# Allegro board AVRUSB500.brd
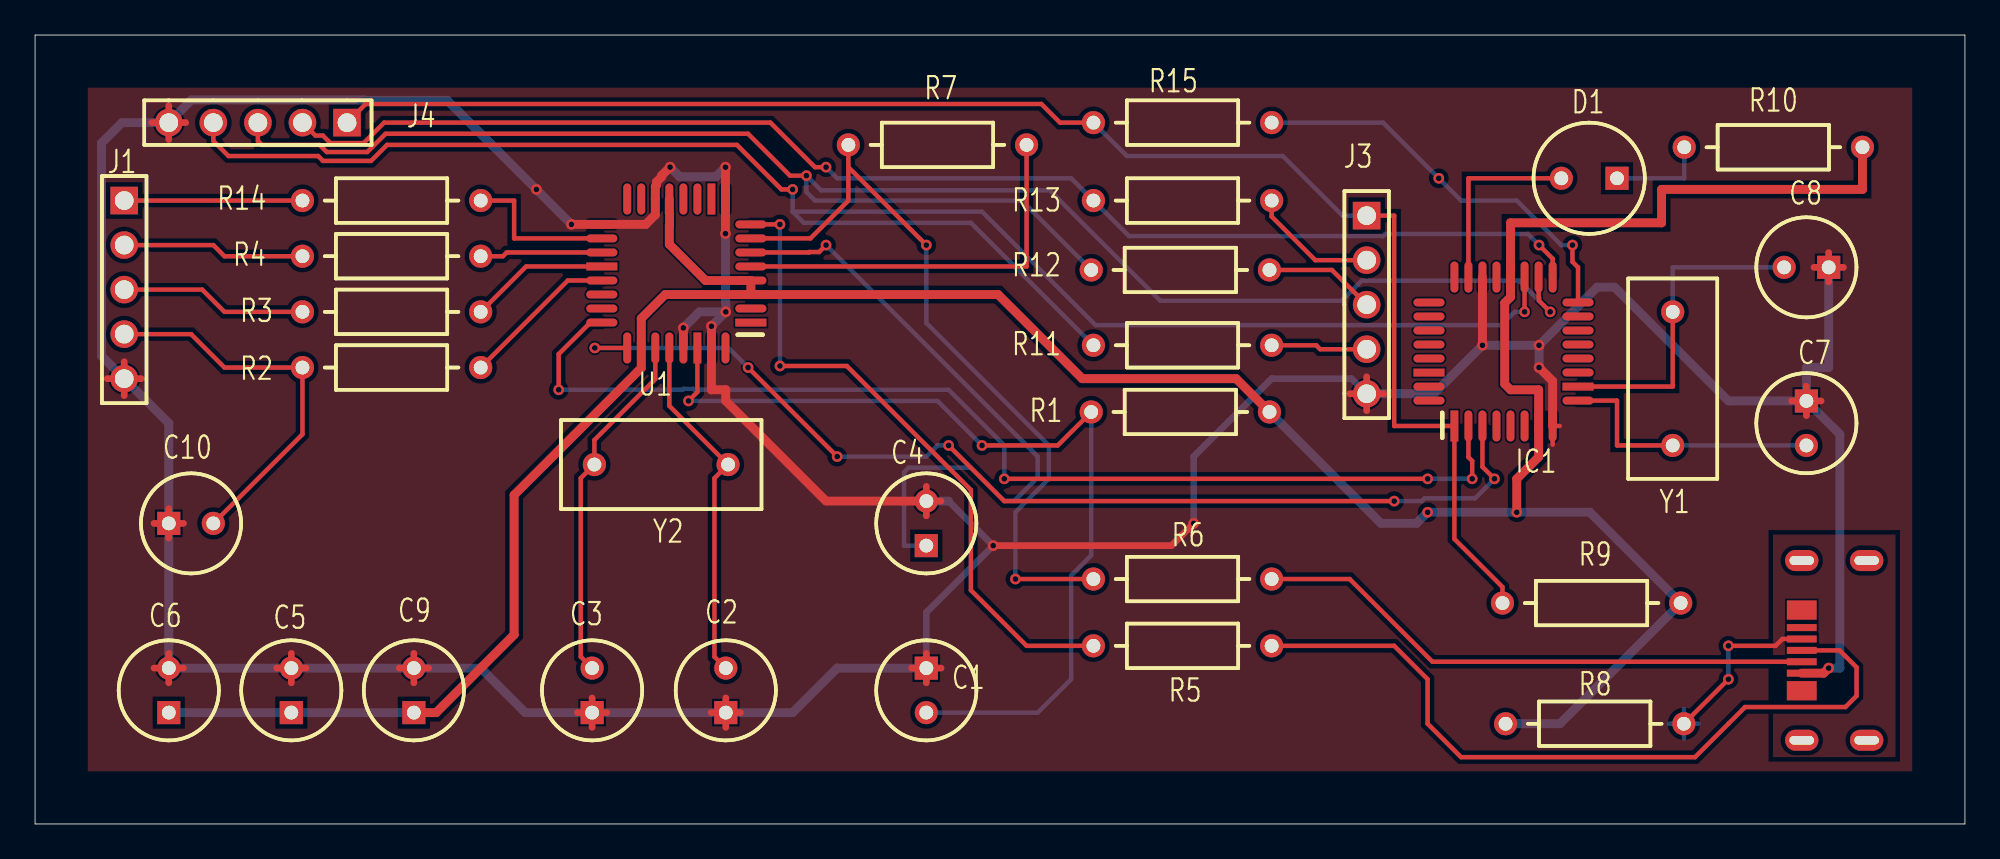
[diagram p0: board, top side]
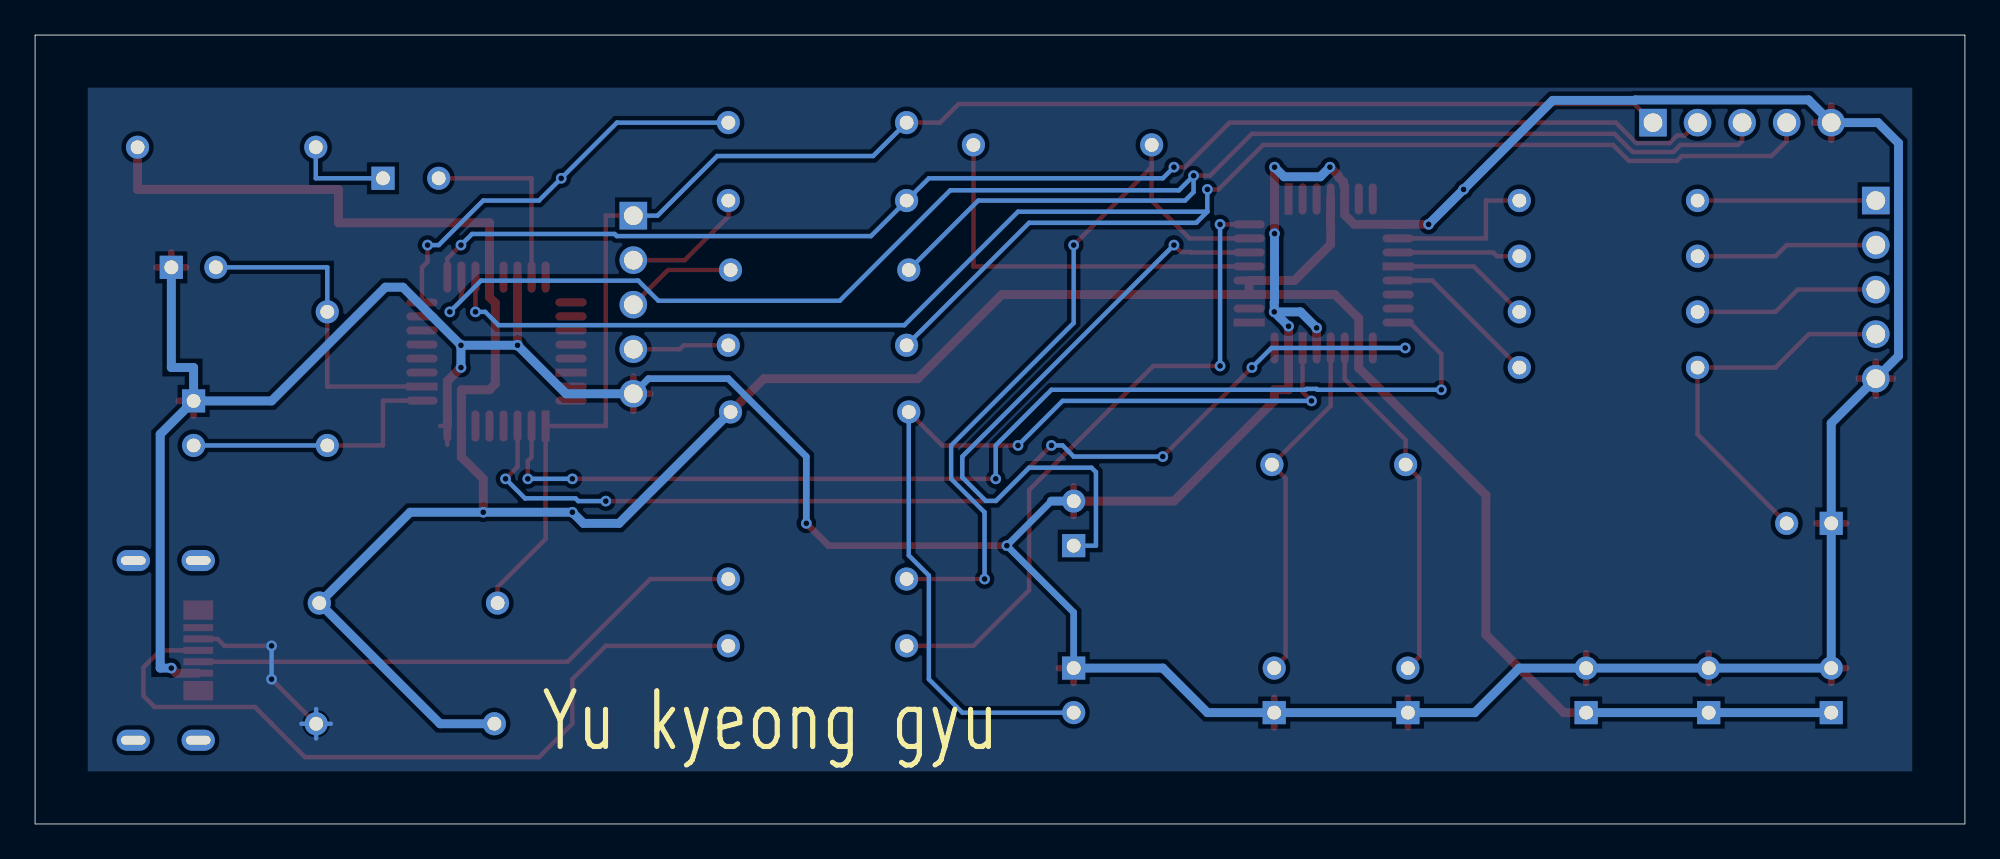
[diagram p1: board, bottom side, seen from below]

Outline 110 x 45 mm; copper layers: TOP, BOTTOM. Coordinates in mm from the lower left corner of the outline.
Outline path: 0,45 110,45 110,0 0,0 0,45

## Design rules (mm)
constraint set DEFAULT: min track width 0.254
net group POWERNETS: nets VCC

## Placement (name value [footprint] x y rotation side)
C1  47nF  [CPCYL1D225LS100031]  50.8 8.89 270 top
C2  27pF  [CPCYL1D225LS100031]  39.37 6.35 90 top
C3  27pF  [CPCYL1D225LS100031]  31.75 6.35 90 top
C4  47nF  [CPCYL1D225LS100031]  50.8 15.88 90 top
C5  100nF  [CPCYL1D225LS100031]  14.6 6.35 90 top
C6  1uF  [CPCYL1D225LS100031]  7.62 6.35 90 top
C7  100nF  [CPCYL1D225LS100031]  100.96 24.13 270 top
C8  100nF  [CPCYL1D225LS100031]  102.24 31.75 180 top
C9  100nF  [CPCYL1D225LS100031]  21.59 6.35 90 top
C10  22nF  [CPCYL1D225LS100031]  7.62 17.14 0 top
D1  LED  [CYLD250LS125031]  90.17 36.83 180 top
IC1  ATmega8  [QUAD80M32WG900]  80.9 22.7 0 top
J1  bbpg_Bitbang  [BLKCON100VHTM1SQSW1005]  5.08 35.56 270 top
J2  USBA  [MICRO_USB]  104.4 9.9 90 top
J3  avrusb500_out  [BLKCON100VHTM1SQSW1005]  75.9 34.7 270 top
J4  firmware_in  [BLKCON100VHTM1SQSW1005]  17.78 40 180 top
NOREF  -  []  0 45 0 top
NOREF#2  -  []  110 0 90 top
R1  470  [AX400X100031]  60.2 23.5 0 top
R2  220  [AX400X100031]  25.4 26.03 180 top
R3  220  [AX400X100031]  25.4 29.21 180 top
R4  220  [AX400X100031]  25.4 32.38 180 top
R5  27  [AX400X100031]  70.49 10.16 180 top
R6  27  [AX400X100031]  70.49 13.97 180 top
R7  1.5k  [AX400X100031]  46.35 38.73 0 top
R8  2.2  [AX400X100031]  93.98 5.72 180 top
R9  10k  [AX400X100031]  93.8 12.6 180 top
R10  470  [AX400X100031]  94 38.6 0 top
R11  1k  [AX400X100031]  60.32 27.31 0 top
R12  220  [AX400X100031]  60.2 31.6 0 top
R13  1k  [AX400X100031]  60.32 35.56 0 top
R14  220  [AX400X100031]  25.4 35.56 180 top
R15  220  [AX400X100031]  70.49 40 180 top
U1  FT232BM  [QUAD80M32WG900]  40.8 28.6 90 top
Y1  3.6864Mhz  [RAD450X200LS300031]  93.34 29.21 270 top
Y2  6Mhz  [RAD450X200LS300031]  39.5 20.5 180 top

## Library data of the parts
C1-C4 C7 C8 C10 = CAPACITOR NON-POL: alternate symbols: (SML2015)
C5 C9 = CAPACITOR NON-POL: alternate symbols: (SMDCAP)
C6 = CAPACITOR POL: alternate symbols: (SMDCAP)
D1 = LED
IC1 = ATmega8-DIL28_1
J1 J3 J4 = CON5
J2 = CON4_7
R1-R15 = R: alternate symbols: (SML2015)
U1 = FT232BM_2: alternate symbols: (JEDECMS026)
Y1 Y2 = ZTA

## Footprints (pads in the part's own frame, mm; a bottom-side part is the same pattern mirrored in y, then rotated)
AX400X100031
  round 1.321 hole 0.787: 1(0,0) 2(10.16,0)
BLKCON100VHTM1SQSW1005
  rect 1.575x1.575 hole 1.067: 1(0,0)
  round 1.575 hole 1.067: 2(2.54,0) 3(5.08,0) 4(7.62,0) 5(10.16,0)
CPCYL1D225LS100031
  rect 1.321x1.321 hole 0.787: 1(0,0)
  round 1.321 hole 0.787: 2(2.54,0)
CYLD250LS125031
  rect 1.321x1.321 hole 0.787: 1(0,0)
  round 1.321 hole 0.787: 2(3.175,0)
MICRO_USB
  oval 1.2x1.9 hole 0.5x1.4: (-5.125,3.7) (-5.125,0) (5.125,3.7) (5.125,0)
  rect 1.1x1.7 smd: (-2.3,3.7) (2.3,3.7)
  rect 0.4x1.7 smd: 1(-1.3,3.7) 2(-0.65,3.7) 3(0,3.7) 4(0.65,3.7) 5(1.3,3.7)
QUAD80M32WG900
  rect 0.457x1.778 smd: 1(0,0) 20(3.2,8.496)
  oval 0.457x1.778 smd: 2(0.8,0) 3(1.6,0) 4(2.4,0) 5(3.2,0) 6(4,0) 7(4.801,0) 8(5.601,0) 17(5.601,8.496) 18(4.801,8.496) 19(4,8.496) 21(2.4,8.496) 22(1.6,8.496) 23(0.8,8.496) 24(0,8.496)
  oval 1.778x0.457 smd: 9(7.048,1.448) 11(7.048,3.048) 12(7.048,3.848) 13(7.048,4.648) 14(7.048,5.448) 15(7.048,6.248) 16(7.048,7.048) 25(-1.448,7.048) 26(-1.448,6.248) 27(-1.448,5.448) 28(-1.448,4.648) 29(-1.448,3.848) 31(-1.448,2.248) 32(-1.448,1.448)
  rect 1.778x0.457 smd: 10(7.048,2.248) 30(-1.448,3.048)
RAD450X200LS300031
  round 1.321 hole 0.787: 1(0,0) 2(7.62,0)

## Nets
+5V: J2.4 R8.1
GND: C1.1 C2.1 C3.1 C4.2 C5.2 C6.2 C7.1 C8.1 C9.2 C10.1 IC1.8 IC1.22 J1.5 J2.1 J3.5 J4.5 U1.9 U1.14 U1.17 U1.29 U1.31
VCC: C5.1 C6.1 C9.1 IC1.7(VCC) IC1.20 R1.2 R8.2 R9.1 R10.2 U1.3 U1.4 U1.13 U1.26
BMISO: J1.3 R3.2
BMOSI: J1.2 R4.2
BRESET: J1.1 R14.2
BSCK: C10.2 J1.4 R2.2
D+: J2.2 R6.1
D-: J2.3 R5.1
F_MISO: IC1.18 J4.3 R12.1
F_MOSI: IC1.17 J4.2 R13.1
F_SCK: IC1.19 J4.4 R11.1
MISO: J3.3 R12.2
MOSI: J3.2 R13.2
RESET: IC1.1 J3.1 J4.1 R9.2 R15.2
RXD: IC1.2 U1.24
SCK: J3.4 R11.2
TXD: IC1.3 U1.25
N02483: R6.2 R7.1 U1.7
N02615: R5.2 U1.8
N03527: C4.1 U1.6
N06839: R2.1 U1.21
N06967: R3.1 U1.20
N07033: R4.1 U1.19
N07247: R14.1 U1.18
N11951: R7.2 U1.5
N41098: C3.2 U1.27 Y2.2
N41106: C2.2 U1.28(XTOUT) Y2.1
N49165: C1.2 R1.1 U1.30
N100346: D1.2(CATHODE) IC1.23
N100350: D1.1 R10.1
N100362: C7.2 IC1.9 Y1.2
N100498: C8.2 IC1.10 Y1.1
N100640: IC1.16 R15.1

Pads without a net: IC1 4 5 6 11 12 13 14 15 21 24 25 26 27 28 29 30 31 32; J2 5; U1 1 2 10 11 12 15 16 22 23 32

## Via types
v1: diameter 0.61, hole 0.33, TOP to BOTTOM, 43 vias

## Routing (per net, layer and track width the routed paths; a pad name or vN(x,y) marks a point on that pad's centre or on a via; arc(x,y) is an arc through that point)
+5V: length 13.2
  TOP w0.254: J2.4 99.6,10.55 99.21,10.16 v1(96.52,10.16) ; R8.1 v1(96.52,8.25)
  BOTTOM w0.254: 93.98,4.88 R8.1 ; R8.1 93.14,5.72 ; R8.1 93.98,6.55 ; R8.1 94.82,5.72 ; v1(96.52,8.25) v1(96.52,10.16)
GND: length 304.7
  TOP w0.254: 86.91,22.7 IC1.8 86.5,21.63
  TOP w0.381: C1.1 50.8,9.73 ; C1.1 50.8,8.05 ; C1.1 51.64,8.89 ; C1.1 49.96,8.89 ; C2.1 39.37,7.19 ; C2.1 38.53,6.35 ; C2.1 39.37,5.51 ; C2.1 40.21,6.35 ; J1.5 6.05,25.4 ; J1.5 5.08,24.43 ; J1.5 4.11,25.4 ; J1.5 5.08,26.37 ; C9.2 22.43,8.89 ; C9.2 21.59,9.73 ; C9.2 21.59,8.05 ; C9.2 20.75,8.89 ; 101.4,31.75 C8.1 ; C8.1 102.24,32.59 ; C8.1 103.07,31.75 ; C8.1 102.24,30.91 ; C10.1 7.62,17.98 ; C10.1 7.62,16.31 ; C10.1 8.46,17.14 ; C10.1 6.78,17.14 ; 6.78,8.89 C6.2 ; C6.2 7.62,9.73 ; C6.2 8.46,8.89 ; C6.2 7.62,8.05 ; 50.8,17.58 C4.2 ; C4.2 50.8,19.25 ; C4.2 51.64,18.41 ; v1(66.04,17.14) 64.77,15.88 v1(54.61,15.88) ; C7.1 100.96,24.97 ; C7.1 100.13,24.13 ; C7.1 100.96,23.29 ; C7.1 101.8,24.13 ; 74.93,24.54 J3.5 ; J3.5 75.9,23.57 ; J3.5 75.9,25.51 ; J3.5 76.87,24.54 ; 31.75,5.51 C3.1 ; C3.1 32.59,6.35 ; C3.1 31.75,7.19 ; C3.1 30.91,6.35 ; 7.62,39.04 J4.5 ; J4.5 7.62,40.97 ; J4.5 6.65,40 ; J4.5 8.59,40 ; C5.2 14.6,9.73 ; C5.2 15.44,8.89 ; C5.2 14.6,8.05 ; C5.2 13.77,8.89
  TOP w0.508: v1(85.72,26.03) 86.5,25.26 IC1.8 ; 45.23,18.41 C4.2 ; U1.29 v1(36.95,28.29) ; IC1.22 v1(82.5,27.31) ; v1(39.35,33.67) U1.9 v1(39.35,37.47) ; v1(36.19,37.47) 35.71,36.98 35.71,36.91 35.42,36.61 35.42,36.43 35.35,36.37 U1.14 35.35,34.75 34.81,34.2 U1.17 v1(30.57,34.2) ; v1(38.55,28.39) U1.31 38.55,24.76 39.37,24.76 39.37,24.13 45.08,18.41 ; v1(102.24,8.89) 101.94,8.6 J2.1
  BOTTOM w0.381: v1(66.04,17.14) 66.04,20.95 70.49,25.4 75.04,25.4 J3.5 ; 52.07,18.41 v1(54.61,15.88) 50.8,12.06 C1.1
  BOTTOM w0.508: v1(39.37,29.21) 37.87,29.21 v1(36.95,28.29) ; v1(39.37,29.21) v1(38.55,28.39) ; v1(39.37,29.21) 39.37,29.77 39.35,29.79 v1(39.35,33.67) ; C7.1 96.52,24.13 90.03,30.62 89.04,30.62 v1(85.72,27.31) ; C7.1 100.96,26.03 102.24,26.03 C8.1 ; C7.1 102.87,22.22 102.87,8.89 v1(102.24,8.89) ; v1(85.72,27.31) v1(82.5,27.31) 79.74,24.54 J3.5 ; v1(85.72,27.31) v1(85.72,26.03) ; v1(39.35,37.47) 38.81,36.92 36.74,36.92 v1(36.19,37.47) ; v1(30.57,34.2) v1(28.57,36.19) 23.5,41.28 18.8,41.28 18.78,41.3 8.92,41.3 J4.5 4.95,40 3.78,38.84 3.78,26.7 J1.5 7.62,22.86 C10.1 C6.2 C5.2 C9.2 25.4,8.89 27.94,6.35 C3.1 C2.1 43.18,6.35 45.72,8.89 C1.1 ; C4.2 52.07,18.41
VCC: length 175.2
  TOP w0.508: U1.3 54.89,30.2 59.69,25.4 68.46,25.4 R1.2 ; U1.3 35.91,30.2 34.55,28.84 U1.26 34.55,26.01 27.31,18.76 27.31,10.79 22.86,6.35 C9.1 ; U1.3 U1.4 38.22,31 36.15,33.06 36.15,34.16 36.17,34.17 36.17,34.84 36.15,34.85 U1.13 ; v1(84.45,17.78) 84.45,19.69 85.7,20.93 IC1.7 85.7,24.76 84.1,24.76 83.77,25.1 83.77,29.72 84.1,30.05 IC1.20 84.1,34.29 92.71,34.29 92.71,36.19 104.16,36.19 R10.2
  BOTTOM w0.508: R1.2 76.71,17.14 78.74,17.14 v1(79.38,17.78) v1(84.45,17.78) 88.62,17.78 R9.1 86.91,5.72 R8.2 ; C6.1 C5.1 C9.1
BMISO: length 10.7
  TOP w0.254: R3.2 10.8,29.21 9.52,30.48 J1.3
BMOSI: length 10.4
  TOP w0.254: J1.2 10.16,33.02 10.8,32.38 R4.2
BRESET: length 10.2
  TOP w0.254: J1.1 R14.2
BSCK: length 21.9
  TOP w0.254: C10.2 15.24,22.22 R2.2 10.8,26.03 8.89,27.94 J1.4
D+: length 32.2
  TOP w0.254: J2.2 79.65,9.25 74.93,13.97 R6.1
D-: length 44.1
  TOP w0.254: R5.1 77.47,10.16 79.38,8.25 79.38,5.72 81.28,3.81 94.62,3.81 96.52,5.72 96.52,5.72 97.47,6.67 103.19,6.67 103.82,7.3 103.82,8.93 102.86,9.9 J2.3
F_MISO: length 101.8
  TOP w0.254: IC1.18 85.7,30.05 85.72,30.03 85.72,29.84 v1(86.36,29.21) ; J4.3 12.7,38.96 12.93,38.73 16.22,38.73 16.62,38.33 18.94,38.33 19.98,39.37 40.64,39.37 43.03,36.98 v1(43.96,36.98)
  BOTTOM w0.254: R12.1 56.24,35.56 44.45,35.56 43.96,36.05 v1(43.96,36.98) 44.8,36.14 57.84,36.14 64.13,29.84 74.47,29.84 75.62,30.99 84.58,30.99 v1(86.36,29.21)
F_MOSI: length 76.6
  TOP w0.254: v1(85.72,33.02) 86.5,32.24 IC1.17 ; v1(45.08,37.47) 44.45,37.47 41.91,40 19.89,40 18.73,38.84 16.83,38.84 16.4,39.27 15.98,39.27 J4.2
  BOTTOM w0.254: v1(45.08,37.47) 45.72,36.83 59.06,36.83 R13.1 62.35,33.53 76.85,33.53 76.97,33.66 85.09,33.66 v1(85.72,33.02)
F_SCK: length 104.2
  TOP w0.254: J4.4 10.16,38.96 11.02,38.1 16.13,38.1 16.41,37.82 19.15,37.82 20.06,38.73 40,38.73 42.55,36.19 v1(43.18,36.19) ; v1(84.9,29.21) IC1.19
  BOTTOM w0.254: 43.18,34.92 53.97,34.92 60.45,28.45 83.58,28.45 84.34,29.21 v1(84.9,29.21) ; 43.18,34.92 43.81,34.29 53.34,34.29 R11.1 ; 43.18,34.92 v1(43.18,36.19)
MISO: length 6.4
  TOP w0.254: R12.2 73.92,31.6 J3.3
MOSI: length 7.4
  TOP w0.254: J3.2 72.97,32.16 70.49,34.65 R13.2
RESET: length 89.4
  TOP w0.254: R9.2 83.64,13.51 80.9,16.25 IC1.1 77.47,22.7 77.47,34.7 J3.1 ; J4.1 18.84,41.07 57.36,41.07 58.42,40 R15.2
  BOTTOM w0.254: R15.2 62.23,38.1 71.12,38.1 74.52,34.7 J3.1
RXD: length 63.7
  TOP w0.254: v1(81.91,19.69) 81.91,20.71 81.7,20.92 IC1.2 ; v1(29.84,24.76) 29.84,26.8 31.64,28.6 U1.24 ; v1(55.25,19.69) v1(79.38,19.69)
  BOTTOM w0.254: v1(79.38,19.69) v1(81.91,19.69) ; v1(29.84,24.76) 36.91,24.76 36.96,24.82 37.53,24.82 37.58,24.76 52.07,24.76 55.25,21.59 v1(55.25,19.69)
SCK: length 5.5
  TOP w0.254: R11.2 73.03,27.31 73.25,27.08 J3.4
TXD: length 61.1
  TOP w0.254: U1.25 v1(31.9,27.15) ; IC1.3 82.5,20.37 v1(83.19,19.69) ; v1(77.47,18.41) 55.25,18.41 v1(52.07,21.59) ; v1(40.64,26.03) v1(45.72,20.95)
  BOTTOM w0.254: v1(77.47,18.41) 79.04,18.41 79.2,18.57 82.07,18.57 v1(83.19,19.69) ; v1(52.07,21.59) 51.44,21.59 50.8,20.95 v1(45.72,20.95) ; v1(31.9,27.15) 39.52,27.15 v1(40.64,26.03)
N02483: length 43.1
  TOP w0.254: v1(55.88,13.97) R6.2 ; R7.1 46.35,37.47 ; 46.35,37.47 v1(50.8,33.02) ; 46.35,37.47 46.35,35.56 44.2,33.4 U1.7
  BOTTOM w0.254: v1(50.8,33.02) 50.8,28.57 57.78,21.59 57.78,19.69 55.88,17.78 v1(55.88,13.97)
N02615: length 37.6
  TOP w0.254: R5.2 56.51,10.16 53.34,13.34 53.34,19.05 46.27,26.12 v1(42.46,26.12) ; U1.8 v1(42.46,34.2)
  BOTTOM w0.254: v1(42.46,34.2) v1(42.46,26.12)
N03527: length 37.2
  TOP w0.254: U1.6 44.11,32.6 44.13,32.62 44.69,32.62 v1(45.08,33.02)
  BOTTOM w0.254: C4.1 49.53,15.88 49.53,20.07 49.78,20.32 53.34,20.32 55.23,18.43 55.81,18.43 57.15,19.77 57.15,20.95 v1(45.08,33.02)
N06839: length 9
  TOP w0.254: U1.21 30.37,31 R2.1
N06967: length 8
  TOP w0.254: U1.20 27.99,31.8 R3.1
N07033: length 7
  TOP w0.254: R4.1 26.67,32.38 26.88,32.6 U1.19
N07247: length 9.1
  TOP w0.254: R14.1 27.31,35.56 27.31,33.4 U1.18
N11951: length 22.6
  TOP w0.254: R7.2 56.51,31.8 U1.5
N41098: length 20.3
  TOP w0.254: U1.27 35.35,25.37 31.88,21.9 Y2.2 31.1,19.72 31.1,9.54 C3.2
N41106: length 20.2
  TOP w0.254: U1.28 36.15,23.85 Y2.1 38.72,19.72 38.72,9.54 C2.2
N49165: length 52.8
  TOP w0.254: v1(53.97,21.59) 58.29,21.59 R1.1 ; v1(37.24,24.13) 37.75,24.64 U1.30
  BOTTOM w0.254: v1(37.24,24.13) 51.44,24.13 v1(53.97,21.59) ; R1.1 60.2,15.32 59.06,14.17 59.06,8.25 57.15,6.35 C1.2
N100346: length 10.9
  TOP w0.254: IC1.23 81.7,36.83 D1.2
N100350: length 5.6
  BOTTOM w0.254: D1.1 94,36.83 R10.1
N100362: length 15.6
  TOP w0.254: Y1.2 90.17,21.59 90.17,24.15 IC1.9
  BOTTOM w0.254: C7.2 Y1.2
N100498: length 18.5
  TOP w0.254: Y1.1 93.34,24.95 IC1.10
  BOTTOM w0.254: Y1.1 93.34,31.75 C8.2
N100640: length 23.4
  TOP w0.254: IC1.16 87.95,31.75 87.63,32.07 v1(87.63,33.02)
  BOTTOM w0.254: R15.1 76.83,40 v1(80.01,36.83) 81.28,35.56 84.45,35.56 87,33.02 v1(87.63,33.02)

## Copper pours and planes (outline as drawn; the poured copper is in the pictures)
+5V on TOP: 99.06,16.51 99.06,3.81 106.05,3.81 106.05,16.51 ; 2 cut-outs
+5V on BOTTOM: 3,3 3,42 107,42 107,3 ; 6 cut-outs
GND on TOP: 3,3 3,42 107,42 107,3 ; 4 cut-outs

## Text on the board
Ref Des/Silkscreen Bottom: Yu kyeong gyu
NCLEGEND-1-2: FIGURE | SIZE | 0.3299 | 0.7869 | 1.0671 | 1.4x0.5001 | DRILL CHART: TOP to BOTTOM | ALL UNITS ARE IN MILLIMETERS | PLATED | QTY | 45 | 56 | 15 | 4
